# Altium PCB CV2018D.PcbDoc
Units mil, origin at the board's own origin, x right, y up, seen from the top; angles counter-clockwise.
Board outline 3804.03 x 3957.03 mil, 4 copper layers (TopLayer, agnd, power, BottomLayer); 106 components, 124 nets, 483 pads, 79 vias.
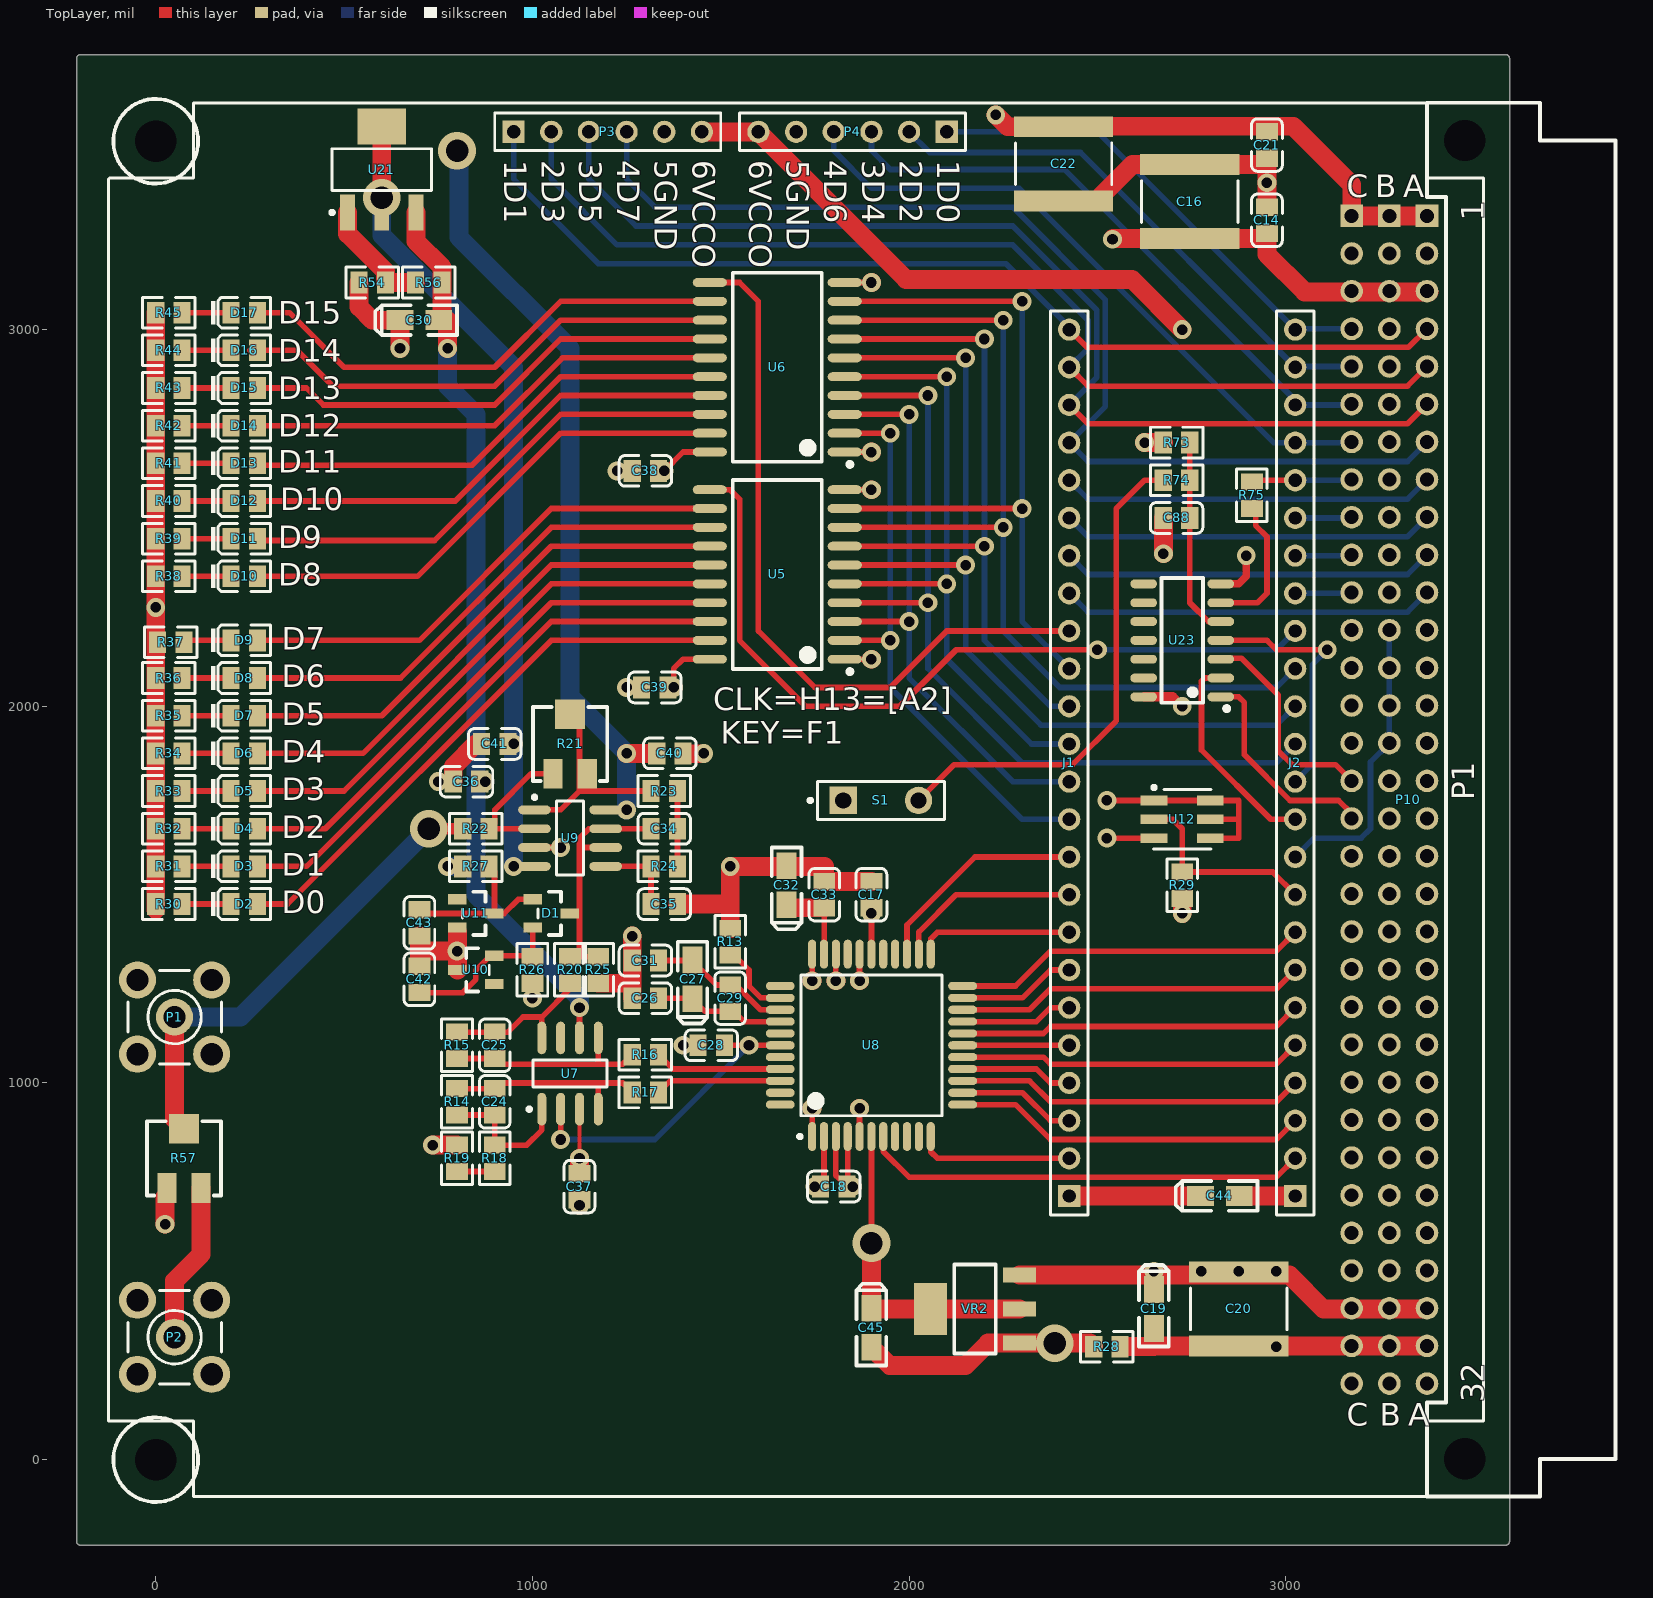
[diagram p0: TopLayer view]
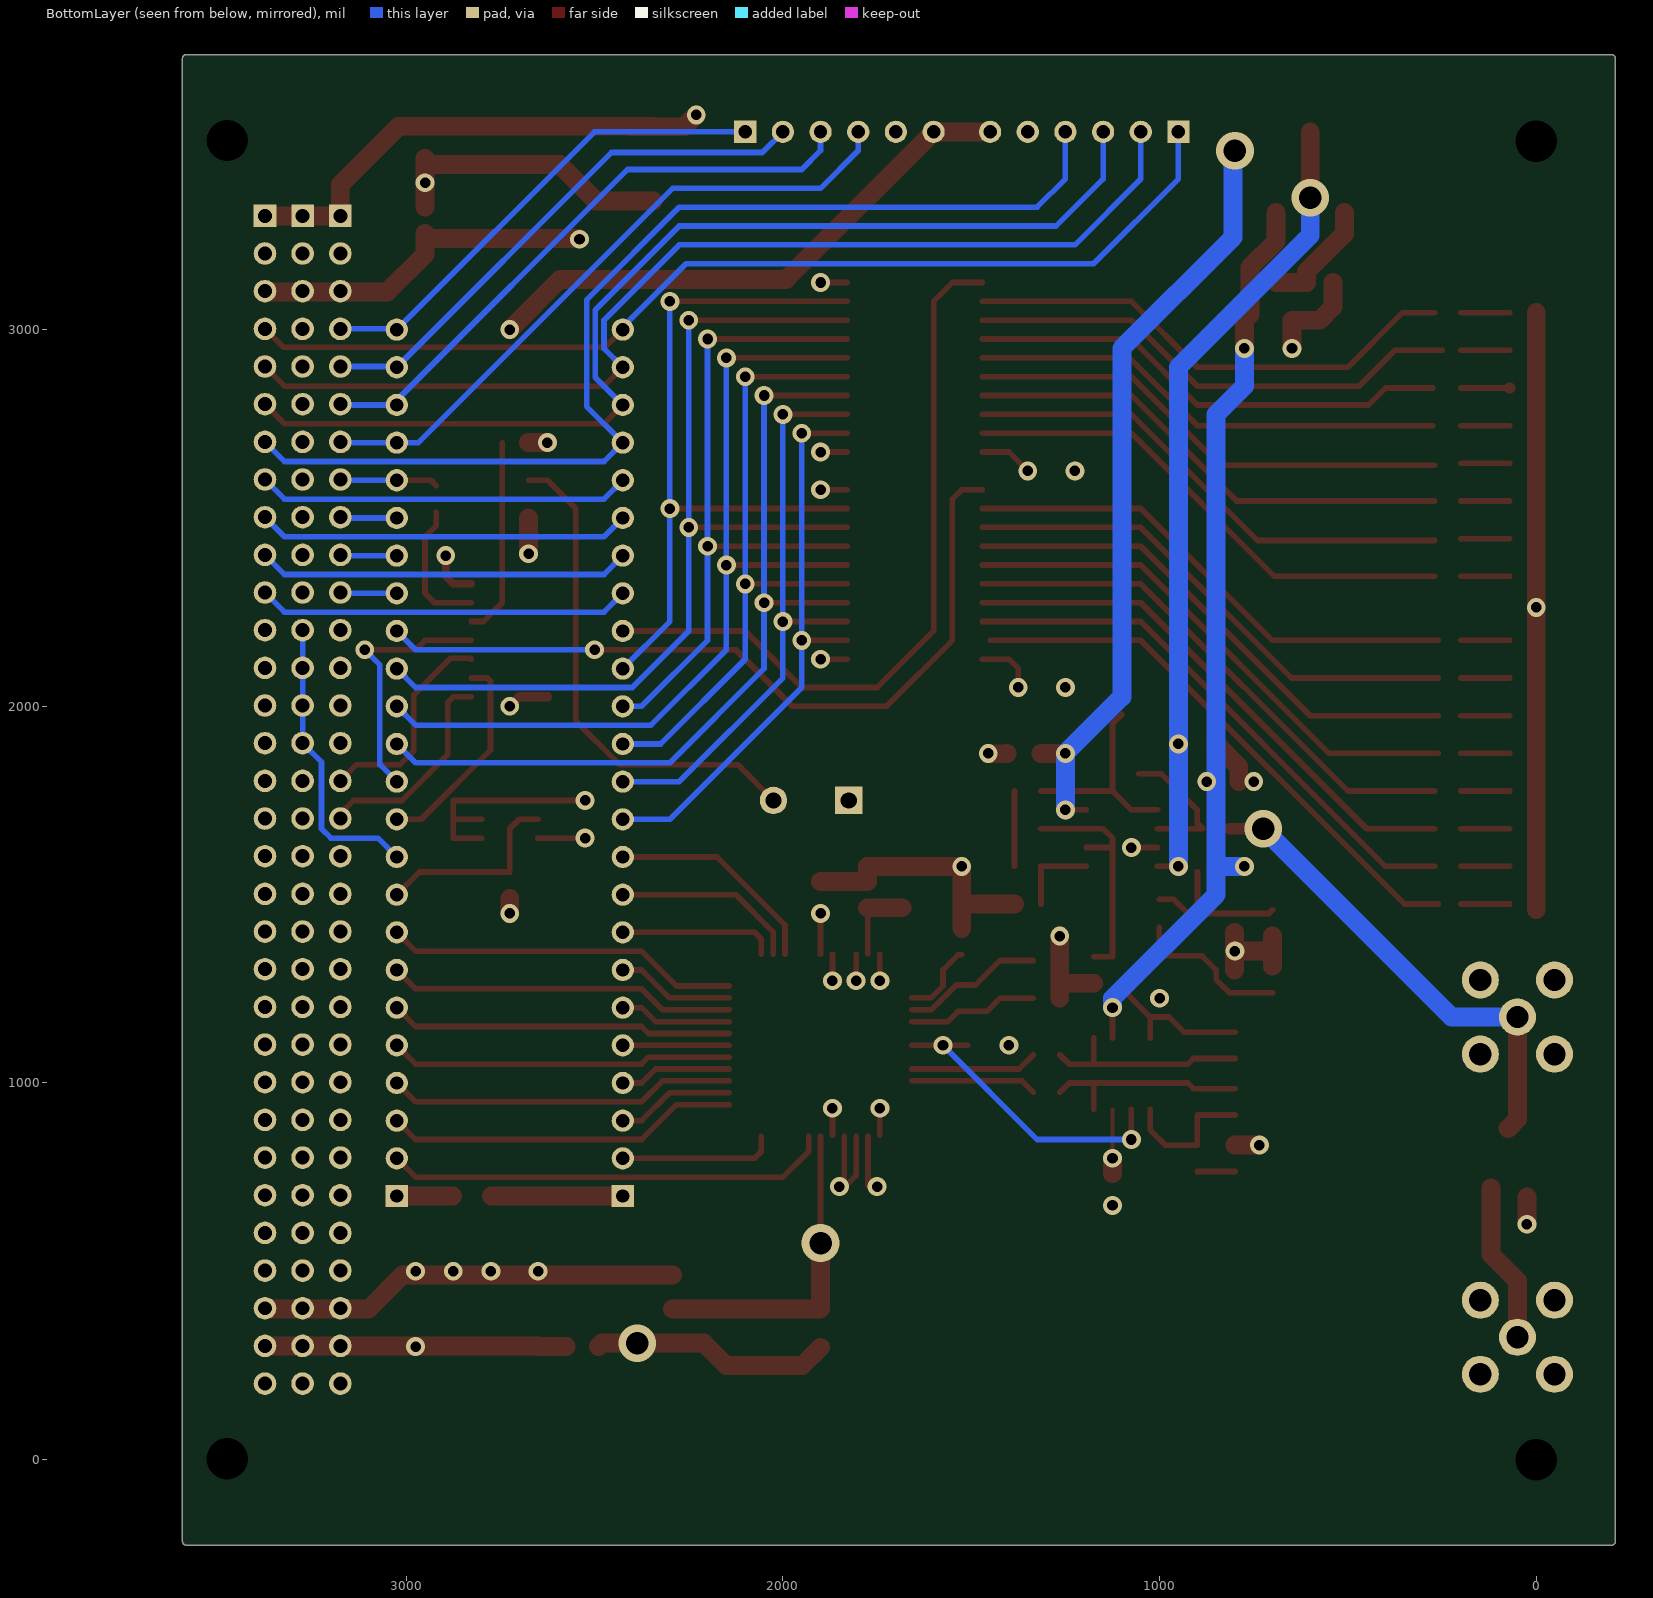
[diagram p1: BottomLayer view, seen from below]
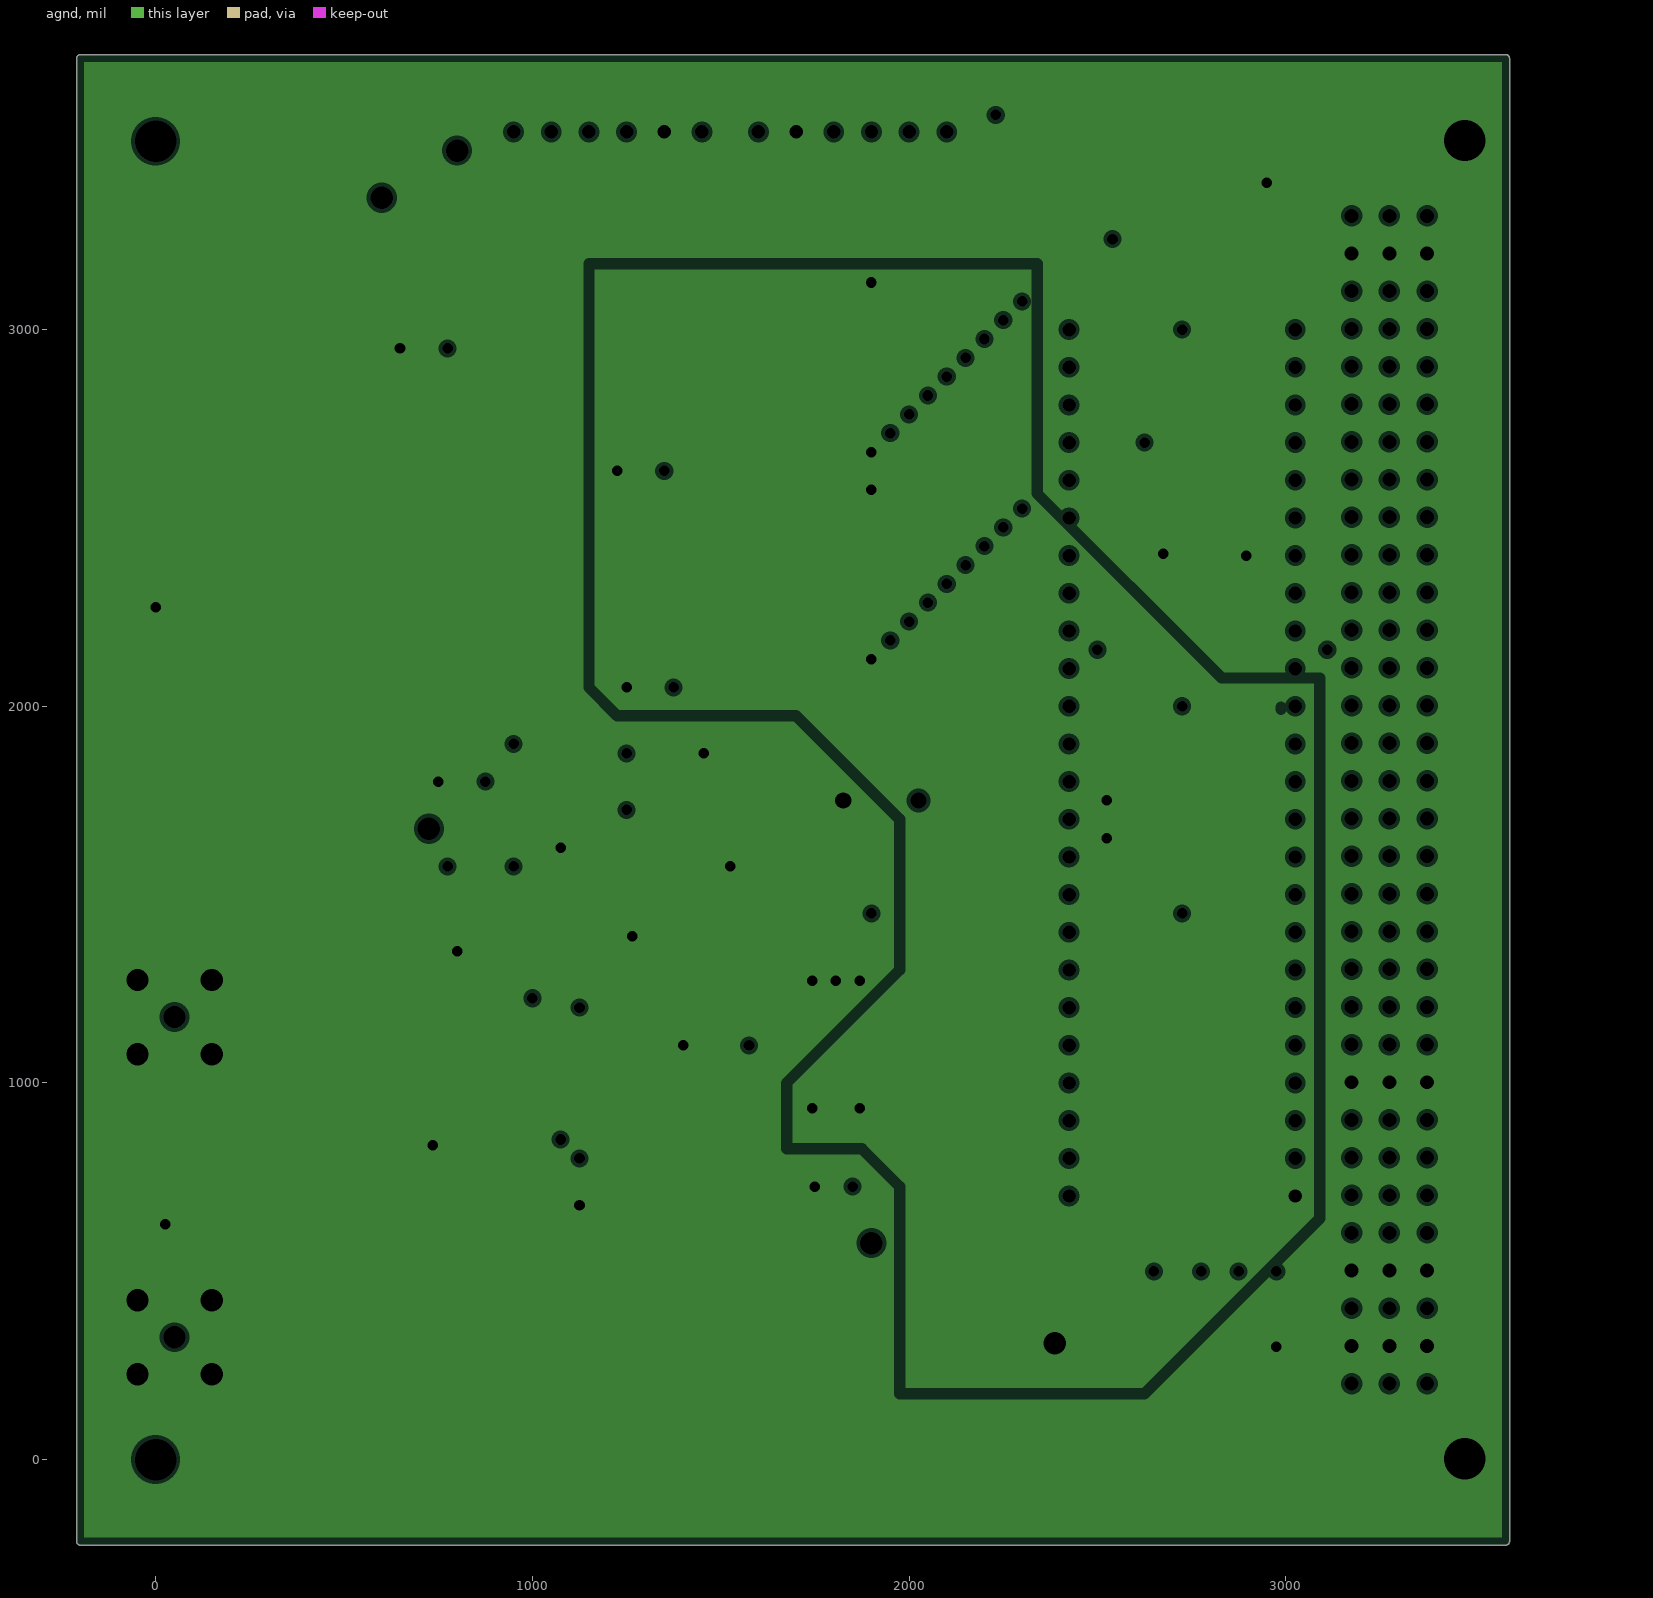
[diagram p2: agnd, clearances drawn from the general rule]
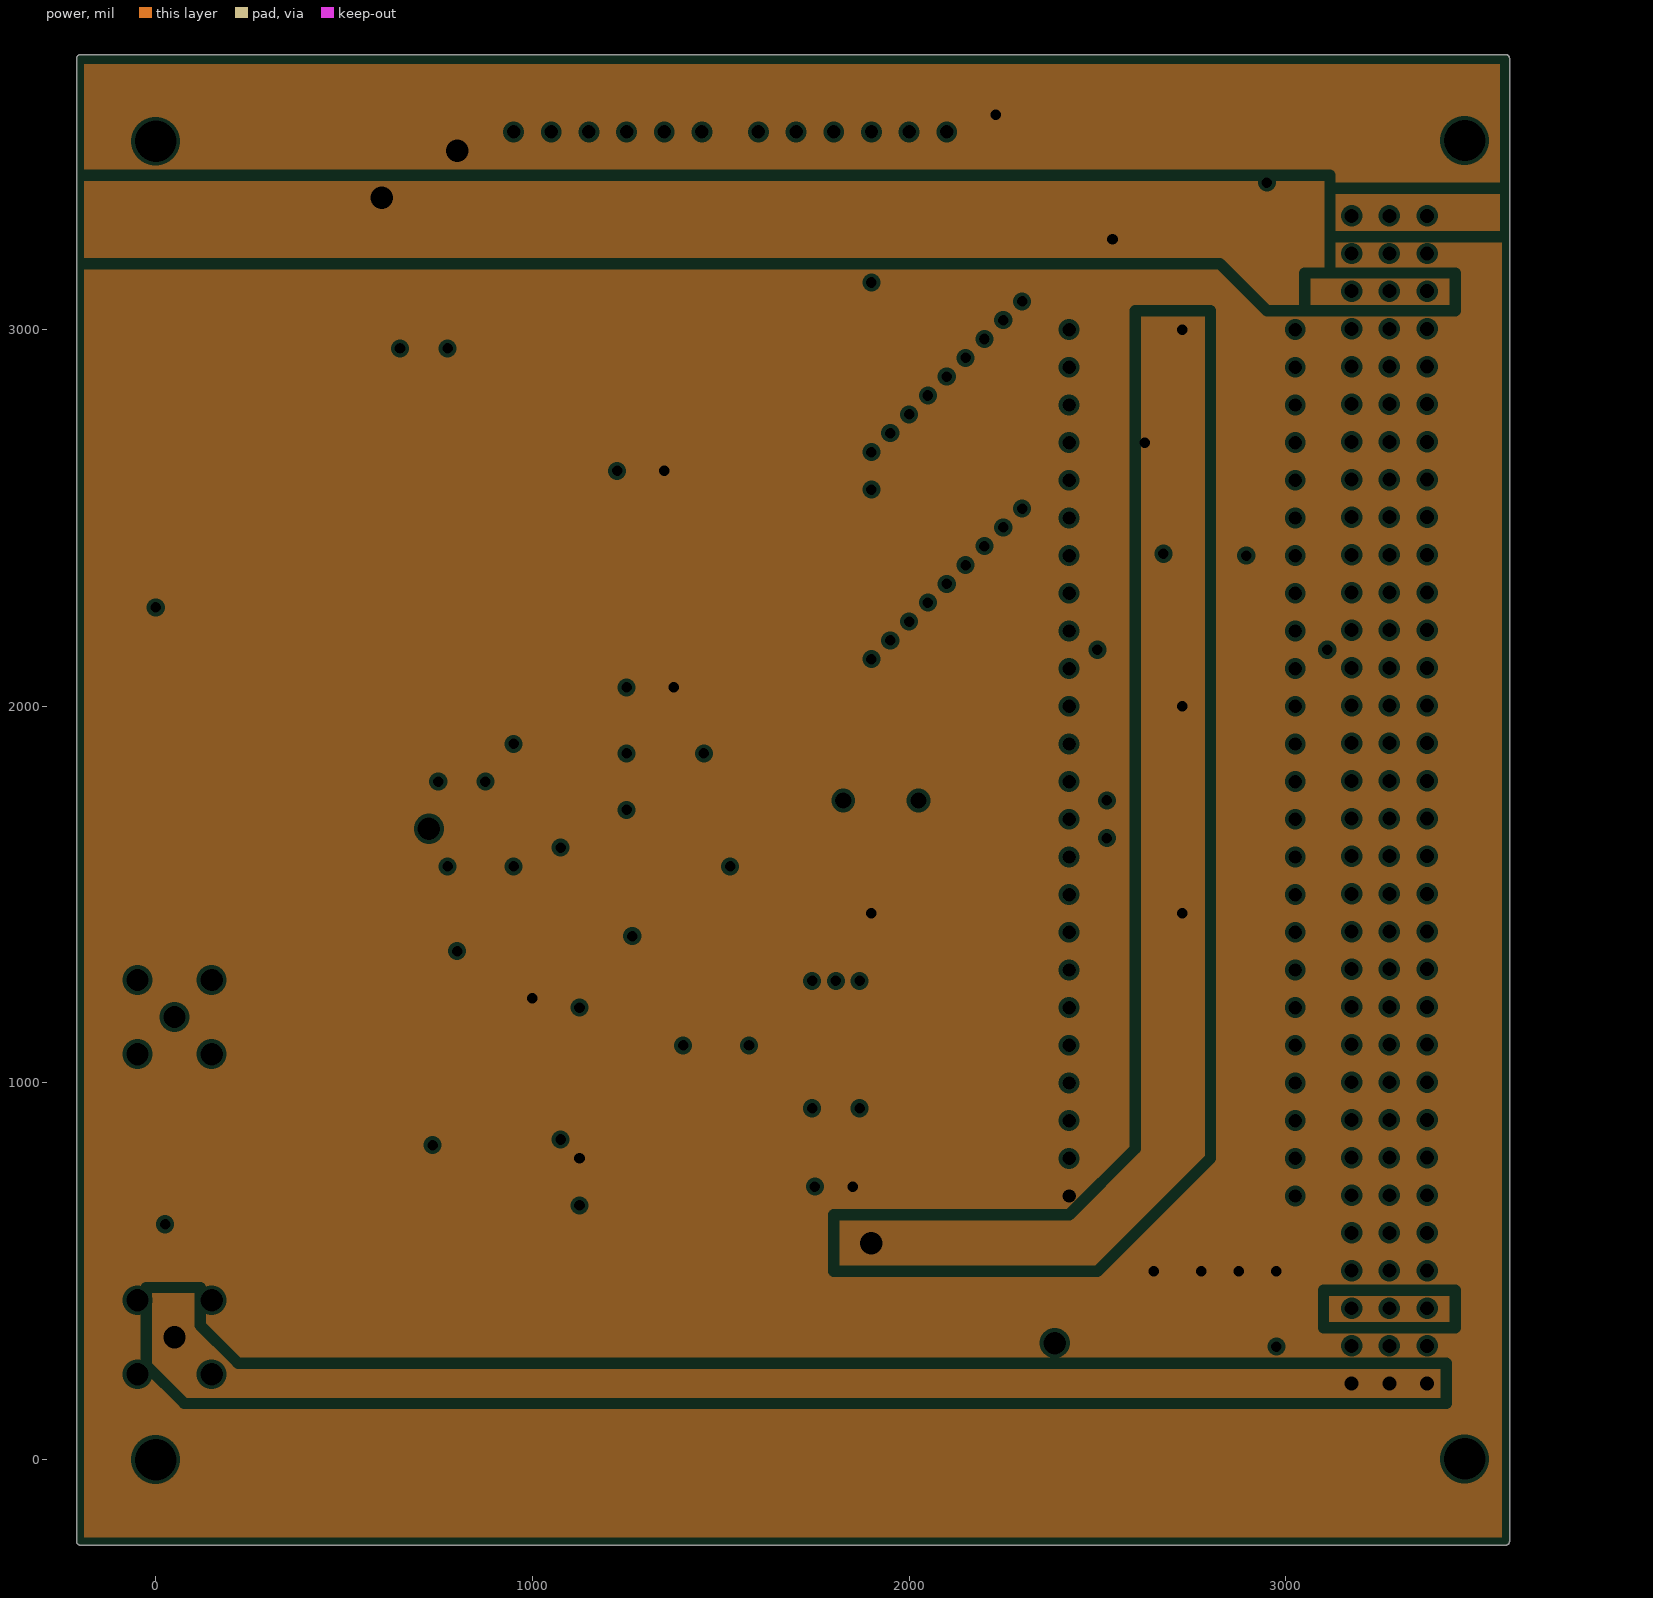
[diagram p3: power, clearances drawn from the general rule]
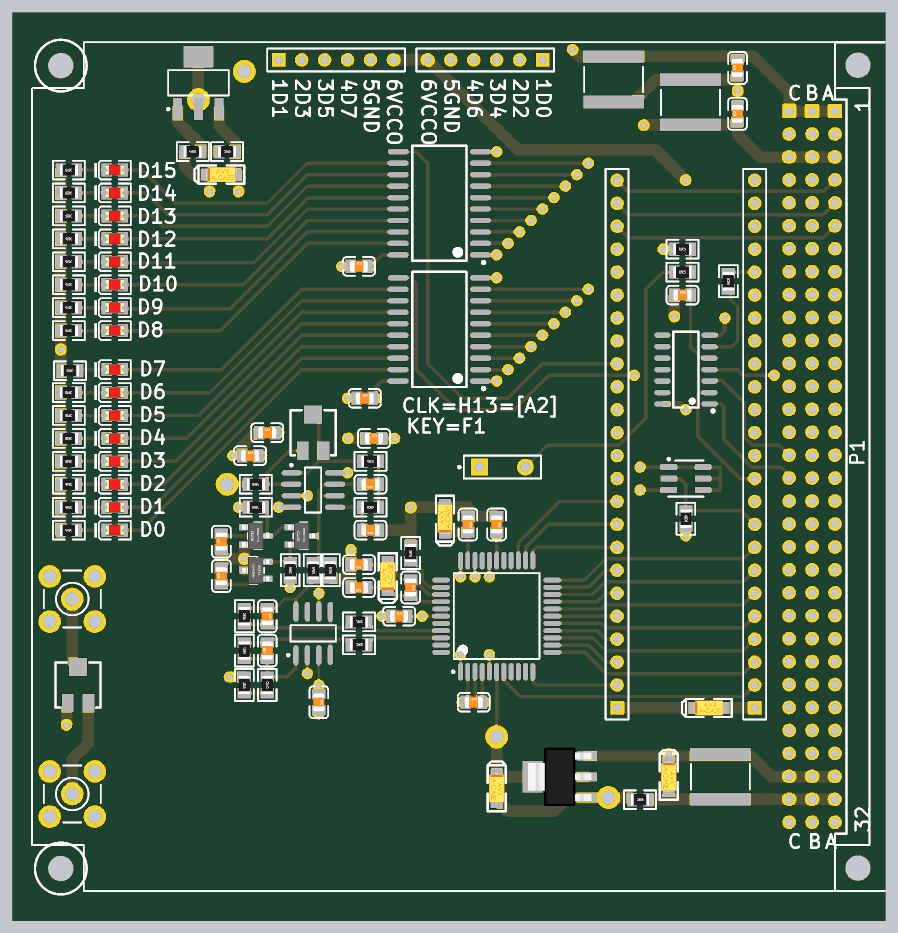
[diagram p4: 3D render of the assembled board from above, using the file's embedded part models]

## Layer stack, top to bottom
TopSolder: solder mask 0.4, Solder Resist, Dk 3.5
TopLayer: signal copper 1.4
Dielectric1: core 12.6, FR-4, Dk 4.8
agnd: plane copper 1.4, net (Multiple Nets)
Dielectric2: prepreg 12.6, FR-4, Dk 4.8
power: plane copper 1.4, net (Multiple Nets)
Dielectric3: core 12.6, FR-4, Dk 4.8
BottomLayer: signal copper 1.4
BottomSolder: solder mask 0.4, Solder Resist, Dk 3.5

## Board outline
-209.7,-214.5 cw(c-200,-212) -210.01,-212 -210.01,3720 cw(c-200,3720) -200,3730.01 3584,3730.01 cw(c3584,3720) 3594.01,3720 3594.01,-217 cw(c3584,-217) 3584,-227.01 -200,-227.01 cw(c-200,-217)

## Design rules (kind name [scope] priority, off if disabled: settings)
Clearance [All] p1: gap=8
DiffPairsRouting [All] p1: maxlimit=10 minlimit=10 mostfreqgap=10 toplayer_minwidth=15 toplayer_maxwidth=15 toplayer_prefwidth=15 bottomlayer_minwidth=15 bottomlayer_maxwidth=15 bottomlayer_prefwidth=15 maxuncoupledlength=500
FabricationTestPointUsage TestPointUsage [All] p1: valid=0 allowmultiple=FALSE
FabricationTestpoint Testpoint [All] p1: side=3 testpointundercomponent=TRUE minsize=40 maxsize=100 preferedsize=60 minholesize=20 maxholesize=40 preferedholesize=32 testpointgrid=1 allowsidetop=TRUE allowsidebottom=TRUE usegrid=TRUE gridtolerance=0.01
PlaneClearance [All] p1: clearance=10
PlaneConnect [All] p1: planeconnectstyle=Relief reliefexpansion=20 reliefentries=4 reliefconductorwidth=10 reliefairgap=10
PolygonConnect [All] p1: connectstyle=Relief reliefconductorwidth=10 reliefentries=4 polygonreliefangle="90 Angle" airgapwidth=10
RoutingVias [All] p1: holewidth=28 width=50 viastyle="Through Hole" minholewidth=28 minwidth=50 maxholewidth=28 maxwidth=50
SilkToSolderMaskClearance SilkscreenOverComponentPads [IsPad] p1: minsilkscreentomaskgap=10 clearancetoexposedcopper=TRUE
SolderMaskExpansion [All] p1: expansion=2
Width [All] p1: maxlimit=100 minlimit=10 preferedwidth=15
23 further rules are at their usual default settings.

## Classes and differential pairs
differential pair OUT: +OUT_P -OUT_N
differential pair VIN: +VIN_P -VIN_N

## Components (designator, comment, footprint, x,y, rotation, side; value= is the part's Value field where it differs from the comment)
C14 "100nF(104) 10% 50V" LC-0805_C 2950,3290 r90 top
C16 "Cap Pol3" C2225 2745,3340.04 r270 top
C17 "100nF(104) 10% 50V" LC-0805_C 1900,1500 r270 top
C18 "100nF(104) 10% 50V" LC-0805_C 1800,725 r0 top
C19 "10uF (106) ±10% 16V" LC-CASE-A_3216 2650,400 r90 top
C20 "Cap Pol3" C2225 2875,400 r270 top
C21 "100nF(104) 10% 50V" LC-0805_C 2950,3490 r90 top
C22 "Cap Pol3" C2225 2410,3440 r270 top
C24 "10nF (103) 10% 50V" LC-0805_C 900,950 r90 top
C25 "10nF (103) 10% 50V" LC-0805_C 900,1100 r270 top
C26 "100nF(104) 10% 50V" LC-0805_C 1300,1225 r180 top
C27 "10uF (106) ±10% 16V" LC-CASE-A_3216 1425,1275 r270 top
C28 "100nF(104) 10% 50V" LC-0805_C 1475,1100 r0 top
C29 "100nF(104) 10% 50V" LC-0805_C 1525,1225 r270 top
C30 "10uF (106) ±10% 16V" LC-CASE-A_3216 700,3025 r180 top
C31 "100nF(104) 10% 50V" LC-0805_C 1300,1325 r180 top
C32 "10uF (106) ±10% 16V" LC-CASE-A_3216 1675,1525 r270 top
C33 "100nF(104) 10% 50V" LC-0805_C 1775,1500 r270 top
C34 "10pF (100) 5% 50V" LC-0805_C 1350,1675 r180 top
C35 "10pF (100) 5% 50V" LC-0805_C 1350,1475 r180 top
C36 "100nF(104) 10% 50V" LC-0805_C 825,1800 r0 top
C37 "100nF(104) 10% 50V" LC-0805_C 1125,725 r270 top
C38 "100nF(104) 10% 50V" LC-0805_C 1300,2625 r0 top
C39 "100nF(104) 10% 50V" LC-0805_C 1325,2050 r0 top
C40 "100nF(104) 10% 50V" LC-0805_C 1365,1875 r0 top
C41 "100nF(104) 10% 50V" LC-0805_C 900,1900 r0 top
C42 "100nF(104) 10% 50V" LC-0805_C 700,1275 r90 top
C43 "100nF(104) 10% 50V" LC-0805_C 700,1425 r90 top
C44 "10uF (106) ±10% 16V" LC-CASE-A_3216 2825,700 r180 top
C45 "10uF (106) ±10% 16V" LC-CASE-A_3216 1900,350 r90 top
C88 "470nF (474) 10% 50V" LC-0805_C 2710,2500 r0 top
D1 "HSMS 2822" LC-SOT-23(SOT-23-3) 1050,1450 r180 top
D2 "红灯 0805" LC-0805_LED_S1 235.04,1475 r0 top
D3 "红灯 0805" LC-0805_LED_S1 235.04,1575 r0 top
D4 "红灯 0805" LC-0805_LED_S1 235.04,1675 r0 top
D5 "红灯 0805" LC-0805_LED_S1 235.04,1775 r0 top
D6 "红灯 0805" LC-0805_LED_S1 235.04,1875 r0 top
D7 "红灯 0805" LC-0805_LED_S1 235.04,1975 r0 top
D8 "红灯 0805" LC-0805_LED_S1 235.04,2075 r0 top
D9 "红灯 0805" LC-0805_LED_S1 235,2175 r0 top
D10 "红灯 0805" LC-0805_LED_S1 235.08,2345 r0 top
D11 "红灯 0805" LC-0805_LED_S1 235.08,2445 r0 top
D12 "红灯 0805" LC-0805_LED_S1 235.08,2545 r0 top
D13 "红灯 0805" LC-0805_LED_S1 235.08,2645 r0 top
D14 "红灯 0805" LC-0805_LED_S1 235.08,2745 r0 top
D15 "红灯 0805" LC-0805_LED_S1 235.08,2845 r0 top
D16 "红灯 0805" LC-0805_LED_S1 235.08,2945 r0 top
D17 "红灯 0805" LC-0805_LED_S1 235.08,3045 r0 top
J1 "Header 24" HDR1X24 2425,700 r90 top
J2 "Header 24" HDR1X24 3025,700 r90 top
P1 "SMB" SMB_V-RJ45 50,1175 r0 top
P2 "SMB" SMB_V-RJ45 50,325 r0 top
P3 "Header 6" HDR1X6 950,3525 r0 top
P4 "Header 6" HDR1X6 2100,3525 r180 top
P10 "CNVME96" CNVME96 3375,3302 r90 top locked
R13 "2KΩ (2001) ±1%" LC-0805_R 1525,1375 r270 top
R14 "510Ω (5100) ±1%" LC-0805_R 800,950 r90 top
R15 "510Ω (5100) ±1%" LC-0805_R 800,1100 r270 top
R16 "49.9Ω (49R9) ±1%" LC-0805_R 1300,1075 r0 top
R17 "49.9Ω (49R9) ±1%" LC-0805_R 1300,975 r0 top
R18 "510Ω (5100) ±1%" LC-0805_R 900,800 r90 top
R19 "15Ω (15R0) ±1%" LC-0805_R 800,800 r270 top
R20 "510Ω (5100) ±1%" LC-0805_R 1100,1300 r270 top
R21 "2K" POT4MM-2 1100,1900 r90 top
R22 "1KΩ (1001) ±1%" LC-0805_R 850,1675 r0 top
R23 "33KΩ (3302) ±1%" LC-0805_R 1350,1775 r0 top
R24 "33KΩ (3302) ±1%" LC-0805_R 1350,1575 r180 top
R25 "49.9Ω (49R9) ±1%" LC-0805_R 1175,1300 r90 top
R26 "3KΩ (3001) ±1%" LC-0805_R 1000,1300 r270 top
R27 "3KΩ (3001) ±1%" LC-0805_R 850,1575 r0 top
R28 "0Ω (0R0) ±1%" LC-0805_R 2525,300 r0 top
R29 "1KΩ (1001) ±1%" LC-0805_R 2725,1525 r270 top
R30 "1KΩ (1001) ±1%" LC-0805_R 35.04,1475 r180 top
R31 "1KΩ (1001) ±1%" LC-0805_R 35.04,1575 r180 top
R32 "1KΩ (1001) ±1%" LC-0805_R 35.04,1675 r180 top
R33 "1KΩ (1001) ±1%" LC-0805_R 35.04,1775 r180 top
R34 "1KΩ (1001) ±1%" LC-0805_R 35.04,1875 r180 top
R35 "1KΩ (1001) ±1%" LC-0805_R 35.04,1975 r180 top
R36 "1KΩ (1001) ±1%" LC-0805_R 35.04,2075 r180 top
R37 "1KΩ (1001) ±1%" LC-0805_R 40.04,2170 r180 top
R38 "1KΩ (1001) ±1%" LC-0805_R 35.08,2345 r180 top
R39 "1KΩ (1001) ±1%" LC-0805_R 35.08,2445 r180 top
R40 "1KΩ (1001) ±1%" LC-0805_R 35.08,2545 r180 top
R41 "1KΩ (1001) ±1%" LC-0805_R 35.08,2645 r180 top
R42 "1KΩ (1001) ±1%" LC-0805_R 35.08,2745 r180 top
R43 "1KΩ (1001) ±1%" LC-0805_R 35.08,2845 r180 top
R44 "1KΩ (1001) ±1%" LC-0805_R 35.08,2945 r180 top
R45 "1KΩ (1001) ±1%" LC-0805_R 35.08,3045 r180 top
R54 "300Ω (3000) ±1%" LC-0805_R 575,3125 r180 top
R56 "100Ω (1000) ±1%" LC-0805_R 725,3125 r180 top
R57 "2K" POT4MM-2 75,800 r90 top
R73 "10KΩ (1002) ±1%" LC-0805_R 2710,2700 r0 top
R74 "330Ω (3300) ±1%" LC-0805_R 2710,2600 r0 top
R75 "200Ω (2000) ±1%" LC-0805_R 2910,2560 r90 top
S1 "SW-PB" SPST-2 1925,1750 r0 top
U5 "74HC573D" LC-SOIC-20_300mil 1650,2350 r90 top
U6 "74HC573D" LC-SOIC-20_300mil 1650,2900 r90 top
U7 "AD8138ARZ" SO-8_N 1100,1025 r90 top
U8 "AD9240AS" S-44-MQFP_N 1900,1100 r90 top
U9 "AD8066AR" SO-8_N 1100,1650 r0 top
U10 "CJ431 0.5%431" LC-SOT-23(SOT-23-3) 850,1300 r0 top
U11 "CJ431 0.5%431" LC-SOT-23(SOT-23-3) 850,1450 r180 top
U12 "DS2432P" TSOC6 2725,1700 r270 top
U21 "LM337IMP/NOPB" MP04A_N 600,3425 r90 top
U23 "74HC14D" LC-SOIC-14_150mil 2725,2175 r90 top
VR2 "AMS1117-3.3" LC-SOT-223 2175,400 r0 top

## Footprints (in the part's own frame and the unit in brackets; to place one, negate y for a bottom-side part, rotate by r counter-clockwise, add the part's x,y. Pads: shape width x height; smd on the part's side, far side on the other; paste and mask are expansions set on the pad)
C2225 [mm] "Chip Capacitor, Body 5.7x6.4mm, IPC High Density"
  rect 1.4x6.7 smd: 1(-2.5,0) 2(2.5,0)
  silkscreen extent -1.4,-3.25 1.4,3.25, body extent -2.95,-3.4 2.95,3.4, height 1.4
CNVME96 [mil]
  round 50 hole 110: 97(200,-100) 98(-3300,-100)
  rect 60x60 / inner round 60 / far side rect 60x60 hole 37: A1(0,0) B1(0,100) C1(0,200)
  round 60 hole 37: A2(-100,0) A3(-200,0) A4(-300,0) A5(-400,0) A6(-500,0) A7(-600,0) A8(-700,0) A9(-800,0) A10(-900,0) A11(-1000,0) A12(-1100,0) A13(-1200,0) A14(-1300,0) A15(-1400,0) A16(-1500,0) A17(-1600,0) A18(-1700,0) A19(-1800,0) A20(-1900,0) A21(-2000,0) A22(-2100,0) A23(-2200,0) A24(-2300,0) A25(-2400,0) A26(-2500,0) A27(-2600,0) A28(-2700,0) A29(-2800,0) A30(-2900,0) A31(-3000,0) A32(-3100,0) B2(-100,100) B3(-200,100) B4(-300,100) B5(-400,100) B6(-500,100) B7(-600,100) B8(-700,100) B9(-800,100) B10(-900,100) B11(-1000,100) B12(-1100,100) B13(-1200,100) B14(-1300,100) B15(-1400,100) B16(-1500,100) B17(-1600,100) B18(-1700,100) B19(-1800,100) B20(-1900,100) B21(-2000,100) B22(-2100,100) B23(-2200,100) B24(-2300,100) B25(-2400,100) B26(-2500,100) B27(-2600,100) B28(-2700,100) B29(-2800,100) B30(-2900,100) B31(-3000,100) B32(-3100,100) C2(-100,200) C3(-200,200) C4(-300,200) C5(-400,200) C6(-500,200) C7(-600,200) C8(-700,200) C9(-800,200) C10(-900,200) C11(-1000,200) C12(-1100,200) C13(-1200,200) C14(-1300,200) C15(-1400,200) C16(-1500,200) C17(-1600,200) C18(-1700,200) C19(-1800,200) C20(-1900,200) C21(-2000,200) C22(-2100,200) C23(-2200,200) C24(-2300,200) C25(-2400,200) C26(-2500,200) C27(-2600,200) C28(-2700,200) C29(-2800,200) C30(-2900,200) C31(-3000,200) C32(-3100,200)
  silkscreen extent -3400,-500 300,0
HDR1X6 [mm] "Connector; Header; 6 Position"
  rect 1.5x1.5 hole 0.9: 1(0,0)
  round 1.5 hole 0.9: 2(2.54,0) 3(5.08,0) 4(7.62,0) 5(10.16,0) 6(12.7,0)
  silkscreen extent -1.27,-1.27 13.97,1.27
HDR1X24 [mm] "Connector; Header; 24 Position"
  rect 1.5x1.5 hole 0.9: 1(0,0)
  round 1.5 hole 0.9: 2(2.54,0) 3(5.08,0) 4(7.62,0) 5(10.16,0) 6(12.7,0) 7(15.24,0) 8(17.78,0) 9(20.32,0) 10(22.86,0) 11(25.4,0) 12(27.94,0) 13(30.48,0) 14(33.02,0) 15(35.56,0) 16(38.1,0) 17(40.64,0) 18(43.18,0) 19(45.72,0) 20(48.26,0) 21(50.8,0) 22(53.34,0) 23(55.88,0) 24(58.42,0)
  silkscreen extent -1.27,-1.27 59.69,1.27
LC-0805_C [mm]
  rect 1.16x1.47 smd: 1(-0.89,0) 2(0.89,0)
  silkscreen extent -1.77,-1.04 1.77,1.04, body extent -1,-0.62 1,0.63, height 0.77
LC-0805_LED_S1 [mm]
  rect 1.16x1.47 smd: A(0.89,0) K(-0.89,0)
  silkscreen extent -2.24,-1.04 1.77,1.03, body extent -1.01,-0.62 1.01,0.62, height 1.1
LC-0805_R [mm]
  rect 1.16x1.47 smd: 1(-0.89,0) 2(0.89,0)
  silkscreen extent -1.77,-1.04 1.77,1.03, body extent -1,-0.62 1,0.63, height 0.49
LC-CASE-A_3216 [mm]
  rect 1.8x1.35 smd: 1(1.31,0) 2(-1.31,0)
  silkscreen extent -2.54,-1 2.97,1, body extent -1.7,-0.84 1.7,0.84, height 1.71
LC-SOIC-14_150mil [mm]
  oval 0.6x1.8 smd: 1(-3.81,-2.6) 2(-2.54,-2.6) 3(-1.27,-2.6) 4(0,-2.6) 5(1.27,-2.6) 6(2.54,-2.6) 7(3.81,-2.6) 8(3.81,2.6) 9(2.54,2.6) 10(1.27,2.6) 11(0,2.6) 12(-1.27,2.6) 13(-2.54,2.6) 14(-3.81,2.6)
  silkscreen extent -4.75,-3.15 4.2,1.4
LC-SOIC-20_300mil [mm]
  oval 0.6x2.3 smd: 1(-5.715,-4.55) 2(-4.445,-4.55) 3(-3.175,-4.55) 4(-1.905,-4.55) 5(-0.635,-4.55) 6(0.635,-4.55) 7(1.905,-4.55) 8(3.175,-4.55) 9(4.445,-4.55) 10(5.715,-4.55) 11(5.715,4.55) 12(4.445,4.55) 13(3.175,4.55) 14(1.905,4.55) 15(0.635,4.55) 16(-0.635,4.55) 17(-1.905,4.55) 18(-3.175,4.55) 19(-4.445,4.55) 20(-5.715,4.55)
  silkscreen extent -6.7,-5.05 6.38,3
LC-SOT-23(SOT-23-3) [mm]
  rect 1.25x0.7 smd: 1(1.25,-0.95) 2(1.25,0.95) 3(-1.25,0)
  silkscreen extent -0.65,-1.46 0.9,1.46, body extent -1.5,-1.5 1.5,1.5, height 1.3
LC-SOT-223 [mm]
  rect 2.2x1 smd: 1(3,-2.3) 2(3,0) 3(3,2.3)
  rect 2.2x3.5 smd: 2(-3,0)
  silkscreen extent -1.4,-3 1.4,3, body extent -3.49,-3.24 3.49,3.24, height 1.64
MP04A_N [mm] "SOT223, 4-Leads, Body 6.5x3.5mm, Pitch 2.3mm, Lead Span 7mm, IPC Medium Density"
  rect 2.4x1 smd: 1(-2.9,2.3) 2(-2.9,0) 3(-2.9,-2.3)
  rect 2.4x3.3 smd: 4(2.9,0)
  silkscreen extent -3.02,-3.35 1.4,3.47, body extent -1.85,-3.35 1.85,3.35, height 1.8
POT4MM-2 [mm] "Square Trimming Potentiometer"
  rect 2x1.3 smd: CCW(-2,-1.15) CW(-2,1.15)
  rect 2x2 smd: W(2,0)
  silkscreen extent -2.5,-2.5 2.5,2.5
S-44-MQFP_N [mm] "QFP, 44-Leads, Body 10x10mm, Pitch 0.8mm, IPC Medium Density"
  oval 1.95x0.55 smd: 1(-6.15,4) 2(-6.15,3.2) 3(-6.15,2.4) 4(-6.15,1.6) 5(-6.15,0.8) 6(-6.15,0) 7(-6.15,-0.8) 8(-6.15,-1.6) 9(-6.15,-2.4) 10(-6.15,-3.2) 11(-6.15,-4) 23(6.15,-4) 24(6.15,-3.2) 25(6.15,-2.4) 26(6.15,-1.6) 27(6.15,-0.8) 28(6.15,0) 29(6.15,0.8) 30(6.15,1.6) 31(6.15,2.4) 32(6.15,3.2) 33(6.15,4)
  oval 0.55x1.95 smd: 12(-4,-6.15) 13(-3.2,-6.15) 14(-2.4,-6.15) 15(-1.6,-6.15) 16(-0.8,-6.15) 17(0,-6.15) 18(0.8,-6.15) 19(1.6,-6.15) 20(2.4,-6.15) 21(3.2,-6.15) 22(4,-6.15) 34(4,6.15) 35(3.2,6.15) 36(2.4,6.15) 37(1.6,6.15) 38(0.8,6.15) 39(0,6.15) 40(-0.8,6.15) 41(-1.6,6.15) 42(-2.4,6.15) 43(-3.2,6.15) 44(-4,6.15)
  silkscreen extent -6.27,-4.75 4.75,4.95, body extent -5,-5 5,5, height 2.45
SMB_V-RJ45 [mm] "Connector; SMB Straight"
  round 2.5 hole 1.5: 1(0,0) 2(-2.5,-2.5) 2(-2.5,2.5) 2(2.5,-2.5) 2(2.5,2.5)
  silkscreen extent -3.15,-3.15 3.15,3.15
SO-8_N [mm] "SOIC, 8-Leads, Body 4.9x3.9mm, Pitch 1.27mm, IPC Medium Density"
  oval 2.2x0.6 smd: 1(-2.4,1.905) 2(-2.4,0.635) 3(-2.4,-0.635) 4(-2.4,-1.905) 5(2.4,-1.905) 6(2.4,-0.635) 7(2.4,0.635) 8(2.4,1.905)
  silkscreen extent -2.52,-2.5 0.9,2.88, body extent -1.95,-2.45 1.95,2.45, height 1.75
SPST-2 [mm] "Switch; 2 Leads"
  rect 1.85x1.85 hole 1.1: 1(-2.54,0)
  round 1.85 hole 1.1: 2(2.54,0)
  silkscreen extent -4.89,-1.27 4.28,1.27
TSOC6 [mm] "Small Outline; 6 C-Bend Leads; Body Width 3.8 mm; Pitch 1.27 mm"
  rect 0.65x1.8 smd: 1(-1.27,-1.9) 2(0,-1.9) 3(1.27,-1.9) 4(1.27,1.9) 5(0,1.9) 6(-1.27,1.9)
  silkscreen extent -2.27,-2.02 2,1.95

## Part data
C14 C17 C18 C21 C26 C28 C29 C31 C33 C36 C37 C38 C39 C40 C41 C42 C43: library part "0805 100nF(104) 10% 50V", "贴片电容"
C16 C20 C22: "Polarized Capacitor (Surface Mount)"
C19 C27 C30 C32 C44 C45: library part "3216 10uF (106) 10% 16V", "钽电容"
C24 C25: library part "0805 10nF (103) 10% 50V", "贴片电容"
C34 C35: library part "0805 10pF (100) 5% 50V", "贴片电容"
C88: library part "0805 470nF (474) 10% 50V", "贴片电容"
D1: library part "SOT-23 BAV99 A7W", "开关二极管"
D2 D3 D4 D5 D6 D7 D8 D9 D10 D11 D12 D13 D14 D15 D16 D17: library part "0805 红灯", "发光二极管"
J1 J2: "Header, 24-Pin"
P1 P2: "SMB Straight Connector"
P3 P4: "Header, 6-Pin"
P10: "96-Pin Connector (3x32 2.54mm grid)"
R13: library part "0805 2KΩ (2001) 1%", "贴片电阻"
R14 R15 R18 R20: library part "0805 510Ω (5100) 1%", "贴片电阻"
R16 R17 R25: library part "0805 49.9Ω (49R9) 1%", "贴片电阻"
R19: library part "0805 15Ω (15R0) 1%", "贴片电阻"
R21 R57: library part "RPot SM", "Square Trimming Potentiometer"
R22 R29 R30 R31 R32 R33 R34 R35 R36 R37 R38 R39 R40 R41 R42 R43 R44 R45: library part "0805 1KΩ (1001) 1%", "贴片电阻"
R23 R24: library part "0805 33KΩ (3302) 1%", "贴片电阻"
R26 R27: library part "0805 3KΩ (3001) 1%", "贴片电阻"
R28: library part "0805 0Ω (0R0) 1%", "贴片电阻"
R54: library part "0805 300Ω (3000) 1%", "贴片电阻"
R56: library part "0805 100Ω (1000) 1%", "贴片电阻"
R73: library part "0805 10KΩ (1002) 1%", "贴片电阻"
R74: library part "0805 330Ω (3300) 1%", "贴片电阻"
R75: library part "0805 200Ω (2000) 1%", "贴片电阻"
S1: "Switch"
U5 U6: "74系列逻辑芯片"
U8: "Complete 14-Bit, 10 MSPS Monolithic A/D Converter, 44-Pin MQFP, Industrial"
U9: library part AD8056AR, "Low Cost, 300MHz Voltage Feedback Amplifier"
U10 U11: "电压基准"
U12: library part DS2430AP, "256-Bit 1-Wire EEPROM"
U21: "3-Terminal Adjustable Negative Regulator, 4-pin SOT-223, Pb-Free"
U23: library part 74HC14D_[C5605], "74系列逻辑芯片"
VR2: library part "SOT-223 AMS1117-3.3", "低压差线性稳压(LDO)"

## Free pads (board coordinates)
  round 50 hole 110: 1(0,3500) 2(0,0)

## Via types
v1: diameter 50, hole 28, TopLayer to BottomLayer, 74 vias
v2: diameter 100, hole 60, TopLayer to BottomLayer, 5 vias

## Nets (pads, with @x,y where several pads share a name; then routed paths per layer and width w, separated by ;. In a path a pad name is that pad's centre, name@x,y a point inside that pad or via, vN(x,y) a via of type N, cw(c..) or ccw(c..) an arc to the next point about the centre after c; other vN are vias at no path point)
+2.5V: C42.1 D1.2 R26.1 U10.2 | length 429.1
  TopLayer w15: C42.1 814.96,1239.96 850,1275 850,1300 887.4,1337.4 U10.2 997.64,1337.4 1000.79,1340.55 D1.2
+5V: C17.2 C18.2 C19.1 C20.1 C37.1 C38.2 C39.2 C44.1 J1.1 P10.A30 P10.B30 P10.C30 R26.2 U5.20 U6.20 U7.3 U8.3 U8.4 U8.28 VR2.3 | length 2334.9
  TopLayer w10: v1(1125,800) U7.3
  TopLayer w15: v1(1350,2625) 1400,2675 U6.20 ; v1(1375,2050) 1375,2100 1400,2125 U5.20 ; U8.3 1805.51,754.53 C18.2 ; C18.2@1837.01,726.97 U8.4 ; U8.28 C17.2
  TopLayer w50: C37.1 v1(1125,800) ; VR2.3 3009.45,490.55 3100,400 P10.A30@3375,400 ; J1.1 C44.1
  other v1: 2650,500 2775,500 2875,500 2975,500 1850,725 1000,1225 1900,1450
+12V: C21.2 C22.1 C40.1 P10.A1 P10.B1 P10.C1 U9.8 | length 3420.7
  TopLayer w10: C22.1@2345,3538.46 C22.1@2346.57,3540.04
  TopLayer w15: U9.8 v1(1250,1725)
  TopLayer w50: v1(1250,1875) C40.1@1314.96,1875 ; v1(2230,3570) 2261.57,3538.43 C22.1 ; C22.1@2346.57,3540.04 3019.96,3540.04 3175,3385 P10.C1 P10.B1 P10.A1
  BottomLayer w50: v2@805,3470 805,3245 1100,2950 1100,2025 v1(1250,1875) v1(1250,1725)
  other v2: 800,3475
-2.5V: C43.2 D1.1 R27.2 U11.3 | length 431.3
  TopLayer w15: C43.2 710.04,1450 U11.3 ; R27.2@899.21,1560.83 U11.3 ; D1.1 962.4,1487.4 925,1450 U11.3
-5V: C30.2 C36.2 R27.1 R56.1 U7.6 U21.3 | length 2450.1
  TopLayer w15: U7.6 v1(1125,1200)
  TopLayer w50: U21.3 690.55,3234.45 760.04,3164.96 R56.1 C30.2@760.04,3039.96 ; v1(775,2950) C30.2@775,3025
  BottomLayer w50: v1(775,1575) 850,1575 ; v1(775,2950) 775,2850 850,2775 850,1575 ; v1@850,1800 v1(875,1800) ; v1(1125,1200) 1125,1225 850,1500 850,1575
-12V: C14.1 C16.2 C41.2 P10.A3 P10.B3 P10.C3 U9.4 U21.2 U21.4 | length 3061.1
  TopLayer w15: v1(950,1575) U9.4
  TopLayer w50: v2@600,3360.83 U21.4@600,3525 ; v1@2541.61,3241.61 C16.2 C14.1@2936.65,3241.61 ; C14.1 2950,3200 3050,3100 P10.A3@3380,3100
  BottomLayer w50: v2(600,3350) 600,3250 950,2900 v1(950,1575)
  other v1: 950,1900 2540,3240
A0: P10.C12
A1: P10.A12
A2: P10.C13
A3: P10.A13
A4: P10.C14
A5: P10.A14
A6: P10.C15
A7: P10.A15
A12: P10.C18
A13: P10.A18
A14: P10.C19
A15: P10.A19
ADCLK: J2.2 U8.7 | length 1182
  TopLayer w15: U8.7 1931.5,818.5 2000,750 2975,750 J2.2
ADOTR: J1.10 U8.25 | length 582.6
  TopLayer w15: U8.25 1994.49,1419.49 2175,1600 J1.10
AGND: C14.2 C16.1 C17.1 C18.1 C19.2 C20.2 C21.1 C22.2 C26.2 C28.1 C30.1 C31.2 C32.2 C33.1 C35.1 C36.1 C37.2 C40.2 C41.1 C42.2 C43.1 C88.1 P1.2 P2.2 P3.5 P4.5 P10.97 P10.98 P10.A2 P10.A24 P10.A29 P10.A31 P10.B2 P10.B24 P10.B29 P10.B31 P10.C2 P10.C24 P10.C29 P10.C31 R13.1 R19.1 R25.1 R28.2 R30.2 R31.2 R32.2 R33.2 R34.2 R35.2 R36.2 R37.2 R38.2 R39.2 R40.2 R41.2 R42.2 R43.2 R44.2 R45.2 R54.2 R57.CW S1.1 U8.2 U8.29 U8.31 U8.33 U9.3 U10.3 U11.2 U23.7 | length 5626.6
  TopLayer w15: U9.3 v1(1075,1625) ; v1(1742.52,1271.26) U8.33 ; C18.1@1774.02,726.97 U8.2 ; v1(1805.51,1271.26) U8.31 ; v1(1868.5,1271.26) U8.29
  TopLayer w20: U23.7 2875,2325 2895,2345 v1(2895,2400)
  TopLayer w50: R30.2@0,1460 R38.2@0,2360 ; R38.2 R39.2 R40.2 R41.2 R42.2 R43.2 R44.2 R45.2 ; v1(25,625) R57.CW@25,697.54 ; R54.2 539.96,3060.04 575,3025 C30.1 v1(648.43,2950) ; C42.2 700,1350 ; C43.1 700,1350 ; v1(735.04,835.04) R19.1 ; C36.1 789.96,1839.96 C41.1@850,1900 ; U10.3 v1@800.79,1350 ; U11.2@800.79,1400 v1@800.79,1350 ; R25.1 1254.92,1264.96 ; C26.2 C31.2 v1(1264.96,1389.96) ; C35.1 1525,1475 ; C40.2@1405,1875 v1@1444,1874 ; R13.1 1525,1475 ; C17.1 C33.1 1775,1575 v1(1525,1575) 1525,1475 ; C22.2@2345,3341.61 2496.57,3341.61 2593.43,3438.46 C16.1 C21.1@2950,3438.46 ; R28.2@2575,300 2650,300 2652,302 ; 2650,302 2652,302 ; v1(2674.96,2404.96) C88.1 ; C14.2 C21.1@2950,3438.46 ; C21.1 C21.1@2950,3438.46 ; P10.A31 P10.B31 P10.C31 2652,302 ; 700,1350 v1(800,1350) v1@800.79,1350
  other v1: 2975,300 1125,675 1750,725 1400,1100 750,1800 1455,1875 0.04,2262.52 2950,3390
CS: J2.10 P10.B12 P10.B13 P10.B14 P10.B15 | length 778.8
  BottomLayer w15: J2.10 3075,1650 3200,1650 3225,1675 3225,1852 P10.B15 P10.B14 P10.B13 P10.B12
D0: J2.24 P4.1 P10.C4 | length 1292.5
  BottomLayer w15: P4.1 2500,3525 J2.24 ; J2.24@3025,3002 P10.C4
D1: J1.24 P3.1 P10.A4 | length 2759.7
  TopLayer w15: J1.24 2472.03,2952.97 3325.97,2952.97 P10.A4
  BottomLayer w15: P3.1 950,3400 1175,3175 2257.28,3175 2425,3007.28 J1.24
D2: J2.23 P4.2 P10.C5 | length 1433.9
  BottomLayer w15: P4.2 2055,3470 2455,3470 J2.23 ; J2.23@3025,2902 P10.C5
D3: J1.23 P3.2 P10.A5 | length 2843.3
  TopLayer w15: J1.23 2475,2850 3323,2850 P10.A5
  BottomLayer w15: P3.2 1050,3400 1225,3225 2275,3225 2475,3025 2475,2950 J1.23
D4: J2.22 P4.3 P10.C6 | length 1609.8
  BottomLayer w15: P4.3 1900,3475 1950,3425 2412.28,3425 3025,2812.28 J2.22 P10.C6@3173,2800
D5: J1.22 P3.3 P10.A6 | length 2891.6
  TopLayer w15: J1.22 2475,2750 3323,2750 P10.A6
  BottomLayer w15: P3.3 1150,3400 1275,3275 2275,3275 2498,3052 2498,2873 J1.22
D6: J2.21 P4.4 P10.C7 | length 1744
  BottomLayer w15: P4.4 1800,3475 1900,3375 2292.72,3375 2967.72,2700 J2.21 P10.C7@3173,2700
D7: J1.21 P3.4 P10.A7 | length 2940
  BottomLayer w15: P3.4 1250,3400 1325,3325 2275,3325 2521,3079 2521,2796 J1.21 2475,2650 3323,2650 P10.A7
D8: J2.20 P10.C8 R75.2 | length 259.2
  TopLayer w15: R75.2@2920,2585.04 2934.96,2600 J2.20
  BottomLayer w15: J2.20 P10.C8@3173,2600
D9: J1.20 P10.A8 | length 992.2
  BottomLayer w15: J1.20 2475,2550 3323,2550 P10.A8
D10: J2.19 P10.C9 | length 148
  BottomLayer w15: J2.19 P10.C9@3173,2500
D11: J1.19 P10.A9 | length 992.2
  BottomLayer w15: J1.19 2475,2450 3323,2450 P10.A9
D12: J2.18 P10.C10 | length 148
  BottomLayer w15: J2.18 P10.C10@3173,2400
D13: J1.18 P10.A10 | length 992.2
  BottomLayer w15: J1.18 2475,2350 3323,2350 P10.A10
D14: J2.17 P10.C11 | length 148
  BottomLayer w15: J2.17 P10.C11@3173,2300
D15: J1.17 P10.A11 | length 992.2
  BottomLayer w15: J1.17 2475,2250 3323,2250 P10.A11
DGND: C38.1 C39.1 C44.2 C45.2 J2.1 R28.1 U5.1 U5.10 U6.1 U6.10 U8.1 U8.5 U12.1 U12.3 U12.4 U12.5 U12.6 VR2.1 | length 1937.8
  TopLayer w15: U8.1@1742.52,862.01 v1(1742.52,932.87) ; U5.1 v1(1900,2125) ; U5.10 v1(1900,2575) ; U6.1 v1(1900,2675) ; U6.10 v1(1900,3125) ; U8.5@1868.5,862.01 v1(1868.5,932.87) ; v1(2525,1650) U12.3 ; v1(2525,1750) U12.1 U12.6 2875,1750 2875,1700 ; U12.4 2875,1650 2875,1700 ; U12.5 2875,1700
  TopLayer w50: C45.2 1948.43,250 2150,250 2209.45,309.45 VR2.1 2480.51,309.45 R28.1 ; C44.2 J2.1
  other v1: 1250,2050 1225,2625
  other v2: 2386.81,309.45
DI0: J1.9 U8.24 | length 498.9
  TopLayer w15: U8.24 2025.98,1400.98 2125,1500 J1.9
DI1: J1.8 U8.23 | length 415.1
  TopLayer w15: U8.23 2057.48,1382.48 2075,1400 J1.8
DI2: J2.8 U8.22 | length 941.9
  TopLayer w15: U8.22 2282.48,1257.48 2375,1350 2975,1350 J2.8
DI3: J1.7 U8.21 | length 313.5
  TopLayer w15: U8.21 2300.98,1225.98 2375,1300 J1.7
DI4: J2.7 U8.20 | length 926.6
  TopLayer w15: U8.20 2319.49,1194.49 2375,1250 2975,1250 J2.7
DI5: J1.6 U8.19 | length 298.2
  TopLayer w15: U8.19 2337.99,1162.99 2375,1200 J1.6
DI6: J2.6 U8.18 | length 911.2
  TopLayer w15: U8.18 2356.5,1131.5 2375,1150 2975,1150 J2.6
DI7: J1.5 U8.17 | length 282.9
  TopLayer w15: U8.17 J1.5
DI8: J2.5 U8.16 | length 911.2
  TopLayer w15: U8.16 2356.5,1068.5 2375,1050 2975,1050 J2.5
DI9: J1.4 U8.15 | length 298.2
  TopLayer w15: U8.15 2337.99,1037.01 2375,1000 J1.4
DI10: J2.4 U8.14 | length 926.6
  TopLayer w15: U8.14 2319.49,1005.51 2375,950 2975,950 J2.4
DI11: J1.3 U8.13 | length 313.5
  TopLayer w15: U8.13 2300.98,974.02 2375,900 J1.3
DI12: J2.3 U8.12 | length 941.9
  TopLayer w15: U8.12 2282.48,942.52 2375,850 2975,850 J2.3
DI13: J1.2 U8.11 | length 415.1
  TopLayer w15: U8.11 2057.48,817.52 2075,800 J1.2
GCLK_N: J2.11 U23.2 | length 566.9
  TopLayer w15: U23.2 2785,2075 2776.43,2066.43 2776.43,1883.57 2960,1700 J2.11@3030,1700
GCLK_N1: P10.C17 U23.1 | length 557.3
  TopLayer w15: U23.1 2875,2025 2890,2010 2890,1871.32 3011.32,1750 3140,1750 P10.C17@3175,1715
GCLK_P: J2.12 U23.4 | length 678.2
  TopLayer w15: U23.4 2950,2175 2975,2150 v1(3110,2150)
  BottomLayer w15: J2.12 3070.03,1845.03 3070.03,2110.03 v1(3110,2150)
GCLK_P1: P10.C16 U23.3 | length 570.7
  TopLayer w15: U23.3 2830,2127.64 2882.36,2127.64 2979.97,2030.03 2979.97,1881.35 3016.29,1845.03 3131.97,1845.03 P10.C16
IO_CT1: J2.16 U5.11 | length 2094.8
  TopLayer w15: U5.11 1525,2575 1550,2550 1550,2175 1725,2000 1975,2000 2125,2150 v1(2500,2150)
  BottomLayer w15: v1(2500,2150) 2975,2150 J2.16
IO_CT2: J1.16 U6.11 | length 1974.1
  TopLayer w15: U6.11 1550,3125 1600,3075 1600,2200 1750,2050 1950,2050 2100,2200 J1.16
IO_D0: J1.11 U5.2 U6.2 | length 1536.7
  TopLayer w15: U5.2 v1(1950,2175) ; U6.2 v1(1950,2725)
  BottomLayer w15: v1(1950,2725) v1(1950,2175) 1950,2050 2300,1700 J1.11
IO_D1: J1.12 U5.3 U6.3 | length 1580.6
  TopLayer w15: U5.3 v1(2000,2225) ; U6.3 v1(2000,2775)
  BottomLayer w15: v1(2000,2775) v1(2000,2225) 2000,2075 2275,1800 J1.12
IO_D2: J2.13 U5.4 U6.4 | length 2266
  TopLayer w15: U5.4 v1(2050,2275) ; U6.4 v1(2050,2825)
  BottomLayer w15: v1(2050,2825) v1(2050,2275) 2050,2100 2300,1850 2975,1850 J2.13
IO_D3: J1.13 U5.5 U6.5 | length 1709.9
  TopLayer w15: U5.5 v1(2100,2325) ; U6.5 v1(2100,2875)
  BottomLayer w15: v1(2100,2875) v1(2100,2325) 2100,2125 2325,1900 J1.13
IO_D4: J2.14 U5.6 U6.6 | length 2395.3
  TopLayer w15: U5.6 v1(2150,2375) ; U6.6 v1(2150,2925)
  BottomLayer w15: v1(2150,2925) v1(2150,2375) 2150,2150 2350,1950 2975,1950 J2.14
IO_D5: J1.14 U5.7 U6.7 | length 1839.2
  TopLayer w15: U5.7 v1(2200,2425) ; U6.7 v1(2200,2975)
  BottomLayer w15: v1(2200,2975) v1(2200,2425) 2200,2175 2375,2000 J1.14
IO_D6: J2.15 U5.8 U6.8 | length 2524.6
  TopLayer w15: U5.8 v1(2250,2475) ; U6.8 v1(2250,3025)
  BottomLayer w15: v1(2250,3025) v1(2250,2475) 2250,2200 2400,2050 2975,2050 J2.15
IO_D7: J1.15 U5.9 U6.9 | length 1968.5
  TopLayer w15: U5.9 v1(2300,2525) ; U6.9 v1(2300,3075)
  BottomLayer w15: v1(2300,3075) v1(2300,2525) 2300,2225 J1.15
KEY: J2.9 R29.1 U12.2 | length 525.2
  TopLayer w15: U12.2@2650,1700 2700,1700 2725,1675 R29.1 2964.96,1560.04 J2.9
NetC24_1: C24.1 R14.1 R18.2 U7.1 | length 377
  TopLayer w15: R14.1 C24.1 R18.2 985.04,835.04 1025,875 U7.1
NetC25_1: C25.1 R15.1 R20.2 U7.8 | length 418.1
  TopLayer w15: R15.1 C25.1 935.04,1135.04 975,1175 1025,1175 ; U7.8 1025,1175 ; R20.2 1100,1250 1025,1175
NetC26_1: C26.1 C27.1 C29.2 U8.37 | length 348.5
  TopLayer w15: C26.1 1423.42,1225 C27.1 1458.46,1189.96 C29.2 1535.04,1189.96 1562.01,1162.99 U8.37
NetC27_2: C27.2 C29.1 C31.1 U8.36 | length 376.9
  TopLayer w15: C31.1 1423.43,1325 1488.39,1260.04 C29.1 1539.96,1260.04 1605.51,1194.49 U8.36
NetC28_2: C28.2 U7.2 U8.39 | length 831.9
  TopLayer w15: v1(1075,850) U7.2 ; C28.2 v1(1575,1100) U8.39
  BottomLayer w15: v1(1075,850) 1325,850 v1(1575,1100)
NetC32_1: C32.1 C33.2 U8.32 | length 225.4
  TopLayer w15: C32.1 C32.1@1683.46,1464.96 ; U8.32@1775,1343.11 C33.2
  TopLayer w50: C32.1@1683.46,1464.96 C33.2
NetC34_1: C34.1 R23.2 R24.1 | length 200
  TopLayer w15: R24.1 C34.1 R23.2
NetC34_2: C34.2 D1.3 R20.1 R25.2 U9.6 U9.7 | length 634.8
  TopLayer w15: 1125,1625 U9.6 ; R25.2 1125,1335.04 1125,1650 1150,1675 U9.7 C34.2
NetC35_2: C35.2 R24.2 U9.5 | length 220.5
  TopLayer w15: U9.5 R24.2 C35.2
NetC88_2: C88.2 R73.2 R74.2 U23.5 | length 528.1
  TopLayer w15: R73.2 R74.2 2745.04,2274.96 2795,2225 U23.5
NetD2_A: D2.A U5.19 | length 1479.9
  TopLayer w15: D2.A@260.04,1475 350,1475 1050,2175 U5.19@1450,2175
NetD2_K: D2.K R30.1 | length 129.9
  TopLayer w15: R30.1 D2.K
NetD3_A: D3.A U5.18 | length 1470
  TopLayer w15: D3.A 400,1575 1050,2225 U5.18
NetD3_K: D3.K R31.1 | length 129.9
  TopLayer w15: R31.1 D3.K
NetD4_A: D4.A U5.17 | length 1449.3
  TopLayer w15: D4.A 450,1675 1050,2275 U5.17
NetD4_K: D4.K R32.1 | length 129.9
  TopLayer w15: R32.1 D4.K
NetD5_A: D5.A U5.16 | length 1428.6
  TopLayer w15: D5.A 500,1775 1050,2325 U5.16
NetD5_K: D5.K R33.1 | length 129.9
  TopLayer w15: R33.1 D5.K
NetD6_A: D6.A U5.15 | length 1417.9
  TopLayer w15: D6.A@260.08,1875 550,1875 1050,2375 U5.15
NetD6_K: D6.K R34.1 | length 129.9
  TopLayer w15: R34.1 D6.K
NetD7_A: D7.A U5.14 | length 1397.2
  TopLayer w15: D7.A@260.08,1975 600,1975 1050,2425 U5.14
NetD7_K: D7.K R35.1 | length 129.9
  TopLayer w15: R35.1 D7.K
NetD8_A: D8.A U5.13 | length 1376.5
  TopLayer w15: D8.A@260.08,2075 650,2075 1050,2475 U5.13
NetD8_K: D8.K R36.1 | length 129.9
  TopLayer w15: R36.1 D8.K
NetD9_A: D9.A U5.12 | length 1355.8
  TopLayer w15: D9.A@260,2175 700,2175 1050,2525 U5.12
NetD9_K: D9.K R37.1 | length 129.9
  TopLayer w15: R37.1@70.08,2175 D9.K
NetD10_A: D10.A U6.19 | length 1358.1
  TopLayer w15: D10.A 695,2345 1075,2725 U6.19
NetD10_K: D10.K R38.1 | length 129.9
  TopLayer w15: R38.1 D10.K
NetD11_A: D11.A U6.18 | length 1339.6
  TopLayer w15: D11.A@270,2440 740,2440 1075,2775 U6.18
NetD11_K: D11.K R39.1 | length 129.9
  TopLayer w15: R39.1 D11.K
NetD12_A: D12.A U6.17 | length 1316.7
  TopLayer w15: D12.A 795,2545 1075,2825 U6.17
NetD12_K: D12.K R40.1 | length 129.9
  TopLayer w15: R40.1 D12.K
NetD13_A: D13.A U6.16 | length 1298.1
  TopLayer w15: D13.A@270.12,2640 840,2640 1075,2875 U6.16
NetD13_K: D13.K R41.1 | length 129.9
  TopLayer w15: R41.1 D13.K
NetD14_A: D14.A U6.15 | length 1270.4
  TopLayer w15: D14.A@275.04,2745 900,2745 1080,2925 U6.15
NetD14_K: D14.K R42.1 | length 129.9
  TopLayer w15: R42.1 D14.K
NetD15_A: D15.A U6.14 | length 1287
  TopLayer w15: D15.A@275.04,2845 400.04,2845 445.04,2800 900,2800 1075,2975 U6.14
NetD15_K: D15.K R43.1 | length 129.9
  TopLayer w15: R43.1 D15.K
NetD16_A: D16.A U6.13 | length 1332.7
  TopLayer w15: D16.A@250.04,2945 375.04,2945 470.04,2850 900,2850 1075,3025 U6.13
NetD16_K: D16.K R44.1 | length 129.9
  TopLayer w15: R44.1 D16.K
NetD17_A: D17.A U6.12 | length 1333.3
  TopLayer w15: D17.A 355,3045 500,2900 900,2900 1075,3075 U6.12
NetD17_K: D17.K R45.1 | length 129.9
  TopLayer w15: R45.1 D17.K
NetR13_2: R13.2 U8.35 | length 205
  TopLayer w15: R13.2 1535.04,1339.96 1575,1300 1575,1257.53 1606.54,1225.98 U8.35
NetR18_1: R18.1 R19.2 | length 100
  TopLayer w15: R19.2 R18.1
NetR21_CCW: R21.CCW R21.W R23.1 U9.1 | length 544.3
  TopLayer w15: U9.1 1075,1725 1125,1775 ; R21.W 1125,1953.74 1125,1775 ; R23.1 1125,1775
NetR21_CW: R21.CW R22.2 U9.2 | length 371.3
  TopLayer w15: U9.2 R22.2 900,1689.96 900,1725 996.26,1821.26 R21.CW
NetR54_1: R54.1 R56.2 U21.1 | length 307.4
  TopLayer w50: U21.1 509.45,3253.95 610.04,3153.36 R54.1 R56.2
NetR74_1: R74.1 S1.2 | length 1332.2
  TopLayer w15: S1.2 2120.03,1845.03 2433.71,1845.03 2550,1961.32 2550,2525 2625,2600 R74.1
NetR75_1: R75.1 U23.6 | length 360.4
  TopLayer w15: U23.6 2925,2275 2950,2300 2950,2450 2920,2480 R75.1@2920,2514.96
OUT_N: C25.2 R15.2 R16.1 U7.5 | length 551
  TopLayer w15: R15.2 C25.2 910.04,1064.96 925,1050 1239.96,1050 R16.1 ; 1175,1050 U7.5
OUT_P: C24.2 R14.2 R17.1 U7.4 | length 551
  TopLayer w15: R14.2 C24.2 910.04,985.04 925,1000 1239.96,1000 R17.1 ; U7.4 1175,1000
VCCO: C45.1 P3.6 P4.6 R29.2 R73.1 U8.6 U23.14 VR2.2 | length 2540.6
  TopLayer w15: v2(1900,575) U8.6
  TopLayer w25: U23.14@2625,2025 2700,2025 v1(2725,2000)
  TopLayer w50: P3.6 P4.6 1992,3133 2592,3133 v1(2725,3000) ; C45.1 v2(1900,575) ; C45.1@1901.58,400 2056.89,400 VR2.2@2293.11,400 ; v1(2625,2700) R73.1 ; v1(2725,1450) R29.2
VE: P2.1 P10.A32 P10.B32 P10.C32 R57.CCW | length 425.4
  TopLayer w50: P2.1 50,475 120.28,545.28 R57.CCW
VIN_N: R17.2 U8.42 | length 335.5
  TopLayer w15: R17.2 1365.55,1005.51 U8.42
VIN_P: R16.2 U8.41 | length 338.6
  TopLayer w15: R16.2 1373.03,1037.01 U8.41
VO: P1.1 R22.1 R57.W | length 1278.7
  TopLayer w30: v2(725,1675) R22.1
  TopLayer w50: P1.1 50,903.74 R57.W
  BottomLayer w50: P1.1 225,1175 v2(725,1675)
pads on no net: P10.A16 P10.A17 P10.A20 P10.A21 P10.A22 P10.A23 P10.A25 P10.A26 P10.A27 P10.A28 P10.B4 P10.B5 P10.B6 P10.B7 P10.B8 P10.B9 P10.B10 P10.B11 P10.B16 P10.B17 P10.B18 P10.B19 P10.B20 P10.B21 P10.B22 P10.B23 P10.B25 P10.B26 P10.B27 P10.B28 P10.C20 P10.C21 P10.C22 P10.C23 P10.C25 P10.C26 P10.C27 P10.C28 U7.7 U8.8 U8.9 U8.10 U8.26 U8.27 U8.30 U8.34 U8.38 U8.40 U8.43 U8.44 U10.1 U11.1 U23.8 U23.9 U23.10 U23.11 U23.12 U23.13

## Polygon pours and split planes (outlines as drawn)
DGND on agnd (split plane): 2324.93,2565 2325.22,2562.06 2326.07,2559.23 2327.47,2556.63 2329.34,2554.34 2819.34,2064.34 2821.63,2062.47 2824.23,2061.07 2827.06,2060.22 2830,2059.93 3074.93,2059.93 3074.93,646.24 2618.76,190.07 1990.07,190.07 1990.07,725 1989.78,727.94 1988.93,730.77 1987.53,733.37 1985.66,735.66 1885.66,835.66 1883.37,837.53 1880.77,838.93 1877.94,839.78 1875,840.07 1690.07,840.07 1690.07,993.76 1985.66,1289.34 1987.53,1291.63 1988.93,1294.23 1989.78,1297.06 1990.07,1300 1990.07,1525 1990.07,1700 1989.78,1702.94 1988.93,1705.77 1987.53,1708.37 1985.66,1710.66 1710.66,1985.66 1708.37,1987.53 1705.77,1988.93 1702.94,1989.78 1700,1990.07 1231.24,1990.07 1165.07,2056.24 1165.07,3159.93 2324.93,3159.93
AGND on agnd (split plane): 3573.92,-206.92 -189.92,-206.92 -189.92,3709.92 3573.92,3709.92
no net on power (split plane): 3568.93,3261.47 3132.6,3261.47 3132.6,3359.93 3568.93,3359.93
no net on power (split plane): 3120.29,3134.93 3434.93,3134.93 3434.93,3065.07 3065.07,3065.07 3065.07,3134.93 3117.53,3134.93 3118.91,3135.06
no net on power (split plane): 3434.93,365.07 3115.07,365.07 3115.07,434.93 3434.93,434.93
VCCO on power (split plane): 2784.93,806.24 2493.76,515.07 1815.07,515.07 1815.07,634.93 2425,634.93 2427.94,635.22 2430.77,636.07 2433.37,637.47 2435.66,639.34 2610.66,814.34 2612.53,816.63 2613.93,819.23 2614.78,822.06 2615.07,825 2615.07,3034.93 2784.93,3034.93
+12V on power (split plane): 3568.93,3390.07 3132.6,3390.07 3132.6,3410 3132.31,3412.94 3131.46,3415.77 3130.06,3418.37 3128.19,3420.66 3125.9,3422.53 3123.3,3423.93 3120.47,3424.78 3117.53,3425.07 -189.92,3425.07 -189.92,3704.93 3568.93,3704.93
-12V on power (split plane): 3102.46,3250 3102.46,3246.4 3102.46,3165.07 3050,3165.07 3047.06,3164.78 3044.23,3163.93 3041.63,3162.53 3039.34,3160.66 3037.47,3158.37 3036.07,3155.77 3035.22,3152.94 3034.93,3150 3034.93,3065.07 2956.24,3065.07 2835.66,3185.66 2833.37,3187.53 2830.77,3188.93 2827.94,3189.78 2825,3190.07 -189.92,3190.07 -189.92,3394.93 3102.46,3394.93
+5V on power (split plane): 3573.92,-206.92 -189.92,-206.92 -189.92,3159.93 2818.76,3159.93 2939.34,3039.34 2941.63,3037.47 2944.23,3036.07 2947.06,3035.22 2950,3034.93 3450,3034.93 3452.94,3035.22 3455.77,3036.07 3458.37,3037.47 3460.66,3039.34 3462.53,3041.63 3463.93,3044.23 3464.78,3047.06 3465.07,3050 3465.07,3150 3464.78,3152.94 3463.93,3155.77 3462.53,3158.37 3460.66,3160.66 3458.37,3162.53 3455.77,3163.93 3452.94,3164.78 3450,3165.07 3132.6,3165.07 3132.6,3231.32 3573.92,3231.32
VE on power (split plane): 102.93,357 103.22,354.06 104.07,351.23 105.47,348.63 107.34,346.34 198.34,255.34 208.34,245.34 210.63,243.47 213.23,242.07 216.06,241.22 219,240.93 3410.93,240.93 3410.93,164.07 82.24,164.07 -9.93,256.24 -9.93,441.93 102.93,441.93

## Other copper
agnd (plane layer: these items are gaps in the copper):
  lines w30: 2987.5,1992.5 2987.5,1997.5 ; 1150,2050 1225,1975 1700,1975 1975,1700 1975,1525 1975,1300 1675,1000 1675,825 1875,825 1975,725 1975,175 2625,175 3090,640 3090,2075 2830,2075 2340,2565 2340,3175 1150,3175 1150,2050
power (plane layer: these items are gaps in the copper):
  lines w30: -210.01,3175 2825,3175 2950,3050 3450,3050 3450,3150 3120.29,3150 ; -200,3410 -115,3410 3117.53,3410 3117.53,3246.4 3584,3246.4 ; -200,3720 3584,3720 3584,3250 ; 3050,3050 3050,3150 3117.53,3150 3117.53,3250 ; 3117.53,3375 3575,3375 ; -25,250 76,149 3426,149 3426,256 219,256 209,266 118,357 118,457 -25,457 -25,250 ; 1800,500 1800,650 2425,650 2600,825 2600,3050 2800,3050 2800,800 2500,500 2325,500 1800,500 ; 3100,350 3100,450 3450,450 3450,350 3100,350

## Silkscreen, mask and mechanical layers (free items; w line width, h text height)
TopOverlay:
  circle w10: c0,0 r112.5
  circle w10: c0,3500 r112.5
  rectangle: 5116,664.58 5866,864.58
  rectangle: 5116,374.58 5866,574.58
  lines w8: -125,3400 -125,102 100,102 100,-98 3375,-98 3375,102 3525,102 3525,3402 3375,3402 3375,3602 100,3602 100,3402 -123,3402
  text "1D1" at 925,3450 h60 r270
  text "2D3" at 1025,3450 h60 r270
  text "3D5" at 1125,3450 h60 r270
  text "4D7" at 1225,3450 h60 r270
  text "5GND" at 1325,3450 h60 r270
  text "6VCCO" at 1425,3450 h60 r270
  text "6VCCO" at 1575,3450 h60 r270
  text "5GND" at 1675,3450 h60 r270
  text "4D6" at 1775,3450 h60 r270
  text "3D4" at 1875,3450 h60 r270
  text "2D2" at 1975,3450 h60 r270
  text "1D0" at 2075,3450 h60 r270
  text "D15" at 325,3015 h60
  text "D14" at 325,2915 h60
  text "D13" at 325,2815 h60
  text "D12" at 325,2715 h60
  text "D11" at 325.04,2620 h60
  text "D10" at 330,2520 h60
  text "D9" at 325.04,2420 h60
  text "D8" at 325.04,2320 h60
  text "D7" at 335.04,2150 h60
  text "D6" at 335.04,2050 h60
  text "CLK=H13=[A2]" at 1480,1990 h60
  text "D5" at 335.04,1950 h60
  text "KEY=F1" at 1500,1900 h60
  text "D4" at 335.04,1850 h60
  text "D3" at 335.04,1750 h60
  text "P1" at 3500,1750 h60 r90
  text "D2" at 335.04,1650 h60
  text "D1" at 335.04,1550 h60
  text "D0" at 335.04,1450 h60
  text "S/N" at 4866,722.08 h75
  text "REV" at 4866,424.58 h75
Mechanical1:
  lines w20: -200,-217 3584,-217 3584,3720 -200,3720 -200,-212

## Text inside footprints (layer, text, board x,y; h text height)
P10: TopOverlay "C" at 3162.5,3352 h60; TopOverlay "B" at 3237.5,3352 h60; TopOverlay "A" at 3312.5,3352 h60; TopOverlay "C" at 3162.5,89.5 h60; TopOverlay "B" at 3250,89.5 h60; TopOverlay "A" at 3325,89.5 h60; TopOverlay "32" at 3525,152 h60 r90; TopOverlay "1" at 3525,3289.5 h60 r90